# EAGLE board sensor-pcb-eagle (EAGLE 9.3.0)
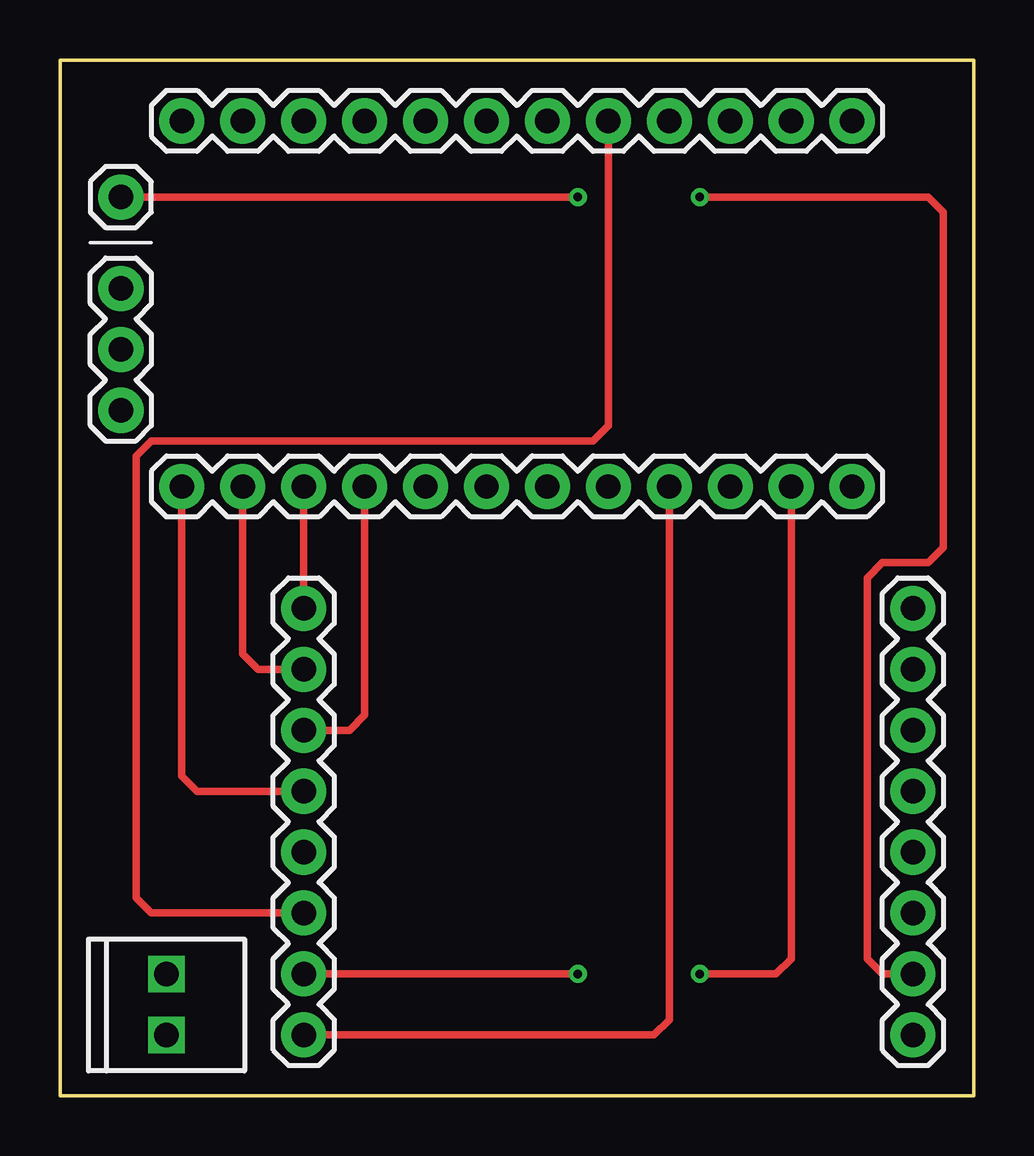
[diagram p0: board, top side]
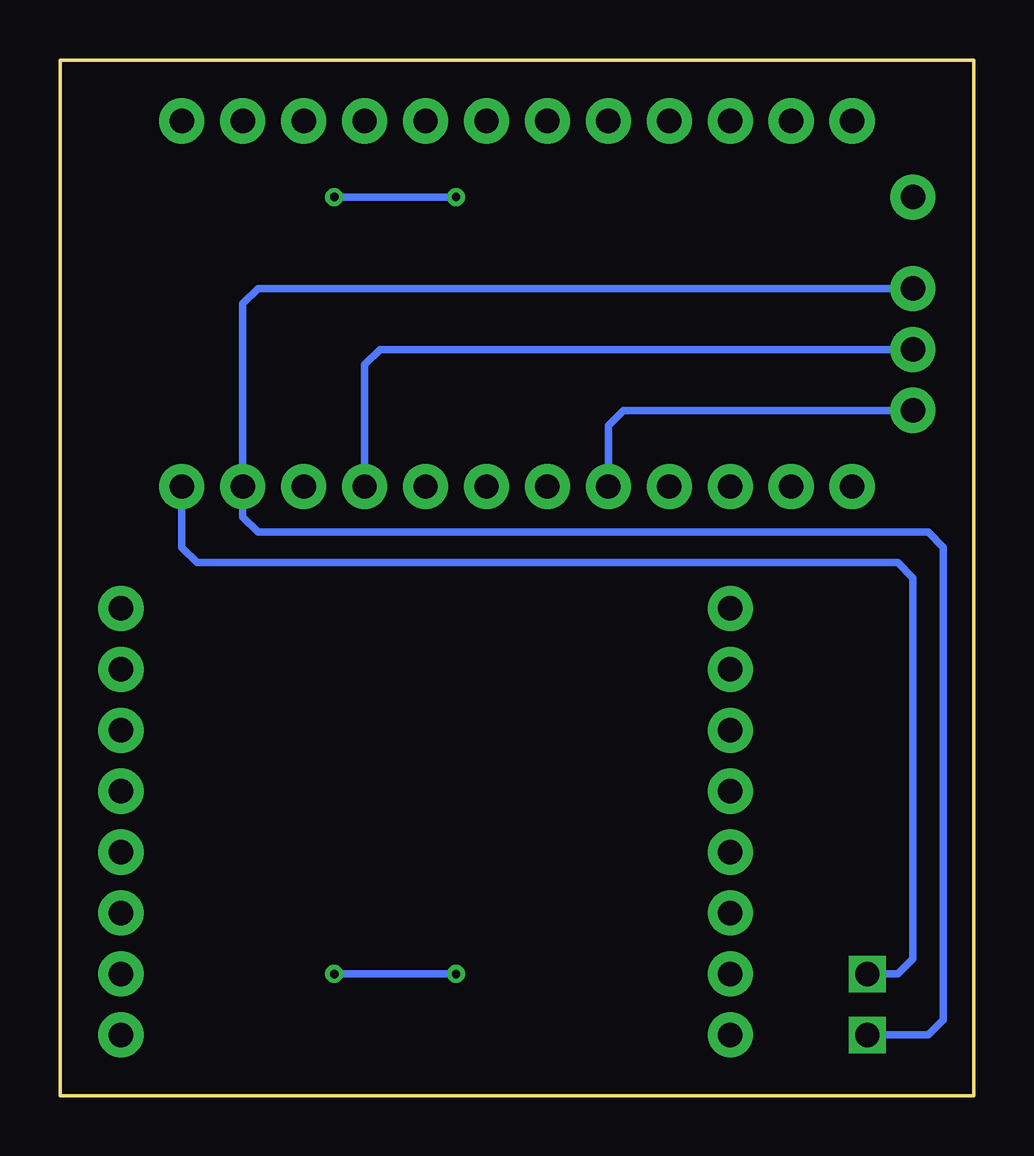
[diagram p1: board, bottom side, seen from below]

Size 38.1 x 43.18 mm. Coordinates in mm from the lower left corner, seen from the top.
Outline: 0,43.18 0,0 38.1,0 38.1,43.18 0,43.18
Copper layers (1*16): Top 0.035mm / dielectric 1.5mm / Bottom 0.035mm
Design rules "default": minimum track width 6mil, minimum drill 0.35mm, track to track 6mil, track to pad 6mil, pad to pad 6mil, via to via 6mil, smd to smd 6mil, copper to edge 40mil, drill to drill 6mil, minimum pad ring 10mil, minimum via ring 8mil, stop-mask expansion 4mil, vias tented up to drill 0mil, thermal gap 10mil

## Footprints (pad centres in the part's own frame; a part is rotated, then mirrored left to right if it is on the bottom)
1X12 = drill 1.016 pad 1.88: 1 0,0; 2 2.54,0; 3 5.08,0; 4 7.62,0; 5 10.16,0; 6 12.7,0; 7 15.24,0; 8 17.78,0; 9 20.32,0; 10 22.86,0; 11 25.4,0; 12 27.94,0
1X08 = drill 1.016 pad 1.88: 1 0,0; 2 2.54,0; 3 5.08,0; 4 7.62,0; 5 10.16,0; 6 12.7,0; 7 15.24,0; 8 17.78,0
1X02_2.54_SCREWTERM = drill 1.016 square: P1 2.54,0; P2 0,0
1X03 = drill 1.016 pad 1.88: 1 0,0; 2 2.54,0; 3 5.08,0
1X01 = drill 1.016 pad 1.88: 1 0,0

## Placement (x,y rotation side)
E$1  [1X12]  5.08,40.64 0 top
E$2  [1X12]  5.08,25.4 0 top
E$3  [1X08]  10.16,2.54 90 top
E$4  [1X08]  35.56,2.54 90 top
E$5  [1X02_2.54_SCREWTERM]  4.45,2.54 90 top
E$6  [1X03]  2.54,28.57 90 top
E$7  [1X01]  2.54,37.46 90 top

## Library data of the parts
E$1-E$7 = SparkFun-Connectors

## Nets
S$1: E$2.3 E$3.8
S$2: E$2.2 E$3.7
S$3: E$2.4 E$3.6
S$4: E$2.1 E$3.5
S$5: E$1.8 E$3.3
S$6: E$2.11 E$3.2 E$5.P2 E$6.3
S$7: E$2.9 E$3.1 E$6.2
S$8: E$4.2 E$7.1
S$9: E$2.12 E$5.P1
S$10: E$2.5 E$6.1

## Tracks (layer width: path | path; a pad name or v marks a point on that pad's centre or on a via)
S$1
  Top 0.305: E$3.8 E$2.3
S$2
  Top 0.305: E$3.7 8.26,17.78 7.62,18.41 E$2.2
S$3
  Top 0.305: E$3.6 12.07,15.24 12.7,15.87 E$2.4
S$4
  Top 0.305: E$3.5 5.71,12.7 5.08,13.33 E$2.1
S$5
  Top 0.305: E$3.3 3.81,7.62 3.17,8.25 3.17,26.67 3.81,27.3 22.22,27.3 22.86,27.94 E$1.8
S$6  (via drill 0.35)
  Top 0.305: v21.59,5.08 E$3.2 | v26.67,5.08 29.84,5.08 30.48,5.71 E$2.11
  Bottom 0.305: v26.67,5.08 v21.59,5.08 | E$5.P2 1.91,2.54 1.27,3.17 1.27,22.86 1.91,23.49 29.84,23.49 30.48,24.13 E$2.11 30.48,33.02 29.84,33.65 E$6.3
S$7
  Top 0.305: E$3.1 24.76,2.54 25.4,3.17 E$2.9
  Bottom 0.305: E$6.2 24.76,31.11 25.4,30.48 E$2.9
S$8  (via drill 0.35)
  Top 0.305: E$4.2 34.29,5.08 33.66,5.71 33.66,21.59 34.29,22.22 36.2,22.22 36.83,22.86 36.83,36.83 36.2,37.46 v26.67,37.46 | v21.59,37.46 E$7.1
  Bottom 0.305: v26.67,37.46 v21.59,37.46
S$9
  Bottom 0.305: E$5.P1 3.17,5.08 2.54,5.71 2.54,21.59 3.17,22.22 32.38,22.22 33.02,22.86 E$2.12
S$10
  Bottom 0.305: E$6.1 14.61,28.57 15.24,27.94 E$2.5